# EAGLE board ORS-Bluefruit-BLE-Dongle-v0.01 (EAGLE 8.2.2)
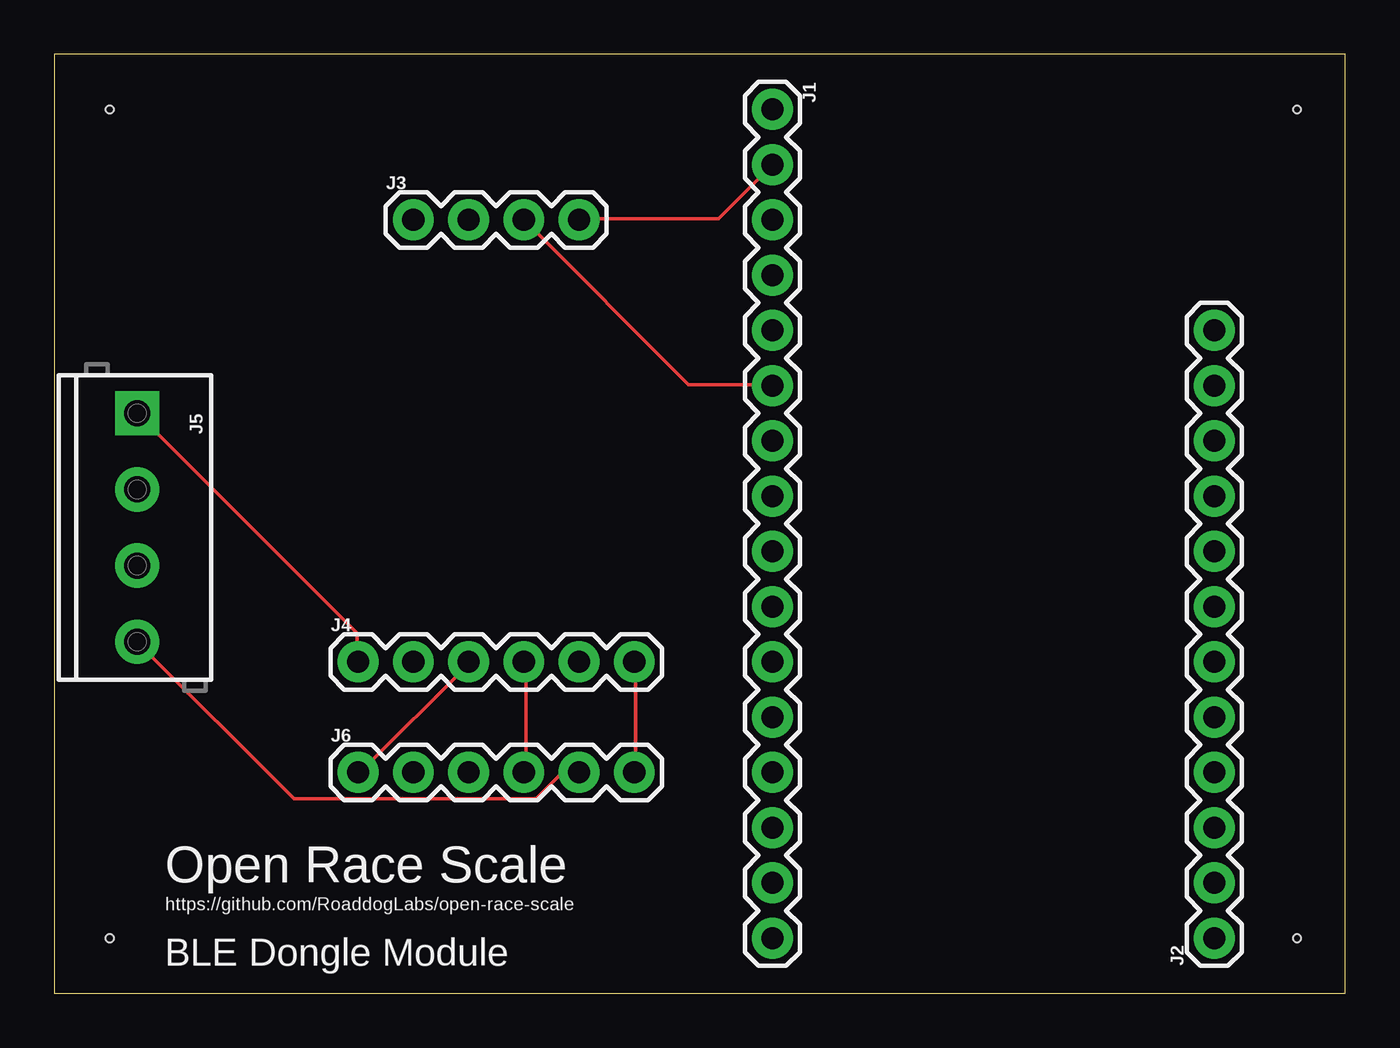
[diagram p0: board, top side]
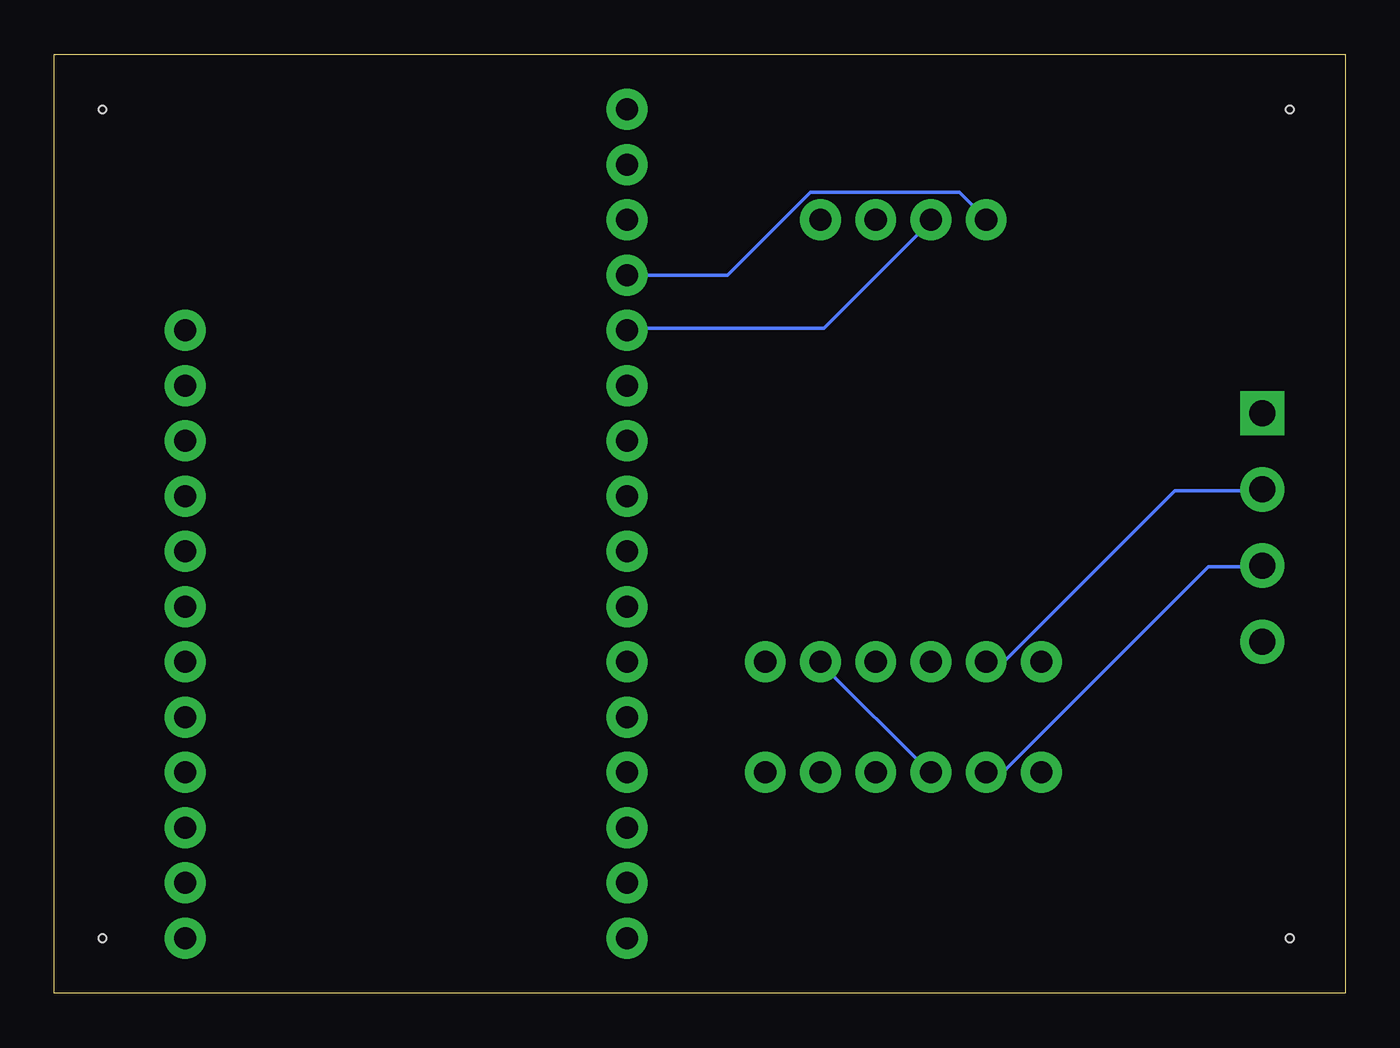
[diagram p1: board, bottom side, seen from below]

Size 59.36 x 43.17 mm. Coordinates in mm from the lower left corner, seen from the top.
Outline: 0,0 59.36,0 59.36,43.17 0,43.17 0,0
Copper layers (1*16): Top 0.035mm / dielectric 1.5mm / Bottom 0.035mm
Design rules "default": minimum track width 6mil, minimum drill 0.35mm, track to track 6mil, track to pad 6mil, pad to pad 6mil, via to via 6mil, smd to smd 6mil, copper to edge 40mil, drill to drill 6mil, minimum pad ring 10mil, minimum via ring 8mil, stop-mask expansion 4mil, vias tented up to drill 0mil, thermal gap 10mil
Holes 0.35 mm at 2.54,40.64 57.15,40.64 2.54,2.54 57.15,2.54

## Footprints (pad centres in the part's own frame; a part is rotated, then mirrored left to right if it is on the bottom)
1X16 = drill 1.016 pad 1.88: 1 0,0; 2 2.54,0; 3 5.08,0; 4 7.62,0; 5 10.16,0; 6 12.7,0; 7 15.24,0; 8 17.78,0; 9 20.32,0; 10 22.86,0; 11 25.4,0; 12 27.94,0; 13 30.48,0; 14 33.02,0; 15 35.56,0; 16 38.1,0
1X12 = drill 1.016 pad 1.88: 1 0,0; 2 2.54,0; 3 5.08,0; 4 7.62,0; 5 10.16,0; 6 12.7,0; 7 15.24,0; 8 17.78,0; 9 20.32,0; 10 22.86,0; 11 25.4,0; 12 27.94,0
1X04 = drill 1.016 pad 1.88: 1 0,0; 2 2.54,0; 3 5.08,0; 4 7.62,0
1X06 = drill 1.016 pad 1.88: 1 0,0; 2 2.54,0; 3 5.08,0; 4 7.62,0; 5 10.16,0; 6 12.7,0
SCREWTERMINAL-3.5MM-4 = drill 1.2 pad 2.032 square: 1 0,0 | drill 1.2 pad 2.032: 2 3.5,0; 3 7,0; 4 10.5,0

## Placement (x,y rotation side)
J1  [1X16]  33.02,40.64 270 top
J2  [1X12]  53.34,2.54 90 top
J3  [1X04]  16.51,35.56 0 top
J4  [1X06]  13.97,15.24 0 top
J5  [SCREWTERMINAL-3.5MM-4]  3.81,26.67 270 top
J6  [1X06]  13.97,10.16 0 top

## Library data of the parts
J1 J2 = SparkFun-Connectors
J3 = SparkFun-Connectors; PROD_ID: CONN-09696
J4 J6 = SparkFun-Connectors; PROD_ID: CONN-08437
J5 = SparkFun-Connectors; PROD_ID: 2xCONN-08399; SF_ID: 2xPRT-08084

## Nets
A+: J4.4 J6.4
A-: J4.3 J6.1
B+: J4.6 J6.6
B-: J4.5 J6.3
DATA: J1.5 J3.2
E+: J4.1 J5.1
E-: J4.2 J5.2
GND: J1.4 J3.1
S+: J5.4 J6.5
S-: J5.3 J6.2
S_CLK: J1.6 J3.3
VCC: J1.2 J3.4

## Tracks (layer width: path | path; a pad name or v marks a point on that pad's centre or on a via)
A+
  Top 0.152: J6.4 21.69,10.16 21.69,15.19 J4.4
A-
  Top 0.152: J6.1 14.07,10.16 19.1,15.19 J4.3
B+
  Top 0.152: J6.6 26.72,10.16 26.72,15.19 J4.6
B-
  Bottom 0.152: J6.3 19.1,10.16 24.13,15.19 J4.5
DATA
  Bottom 0.152: J1.5 32.97,30.58 23.98,30.58 19.1,35.46 J3.2
E+
  Top 0.152: J5.1 13.92,16.56 13.92,15.34 J4.1
E-
  Bottom 0.152: J4.2 16.51,15.34 15.6,15.34 7.82,23.11 3.86,23.11 J5.2
GND
  Bottom 0.152: J1.4 28.4,33.02 24.59,36.83 17.73,36.83 16.51,35.61 J3.1
S+
  Top 0.152: J6.5 23.37,10.16 22.15,8.94 11.02,8.94 3.86,16.1 J5.4
S-
  Bottom 0.152: J6.2 15.75,10.16 6.3,19.61 3.86,19.61 J5.3
S_CLK
  Top 0.152: J3.3 29.16,27.99 32.97,27.99 J1.6
VCC
  Top 0.152: J1.2 30.53,35.61 24.13,35.61 J3.4

## Text on the board
tNames: Open Race Scale | https://github.com/RoaddogLabs/open-race-scale | BLE Dongle Module